# Altium PCB PCB.PcbDoc
Units mm, origin at the board's own origin, x right, y up, seen from the top; angles counter-clockwise.
Board outline 30 x 30 mm, 2 copper layers (Top Layer, Bottom Layer); 4 components, 4 nets, 46 pads, 0 vias.
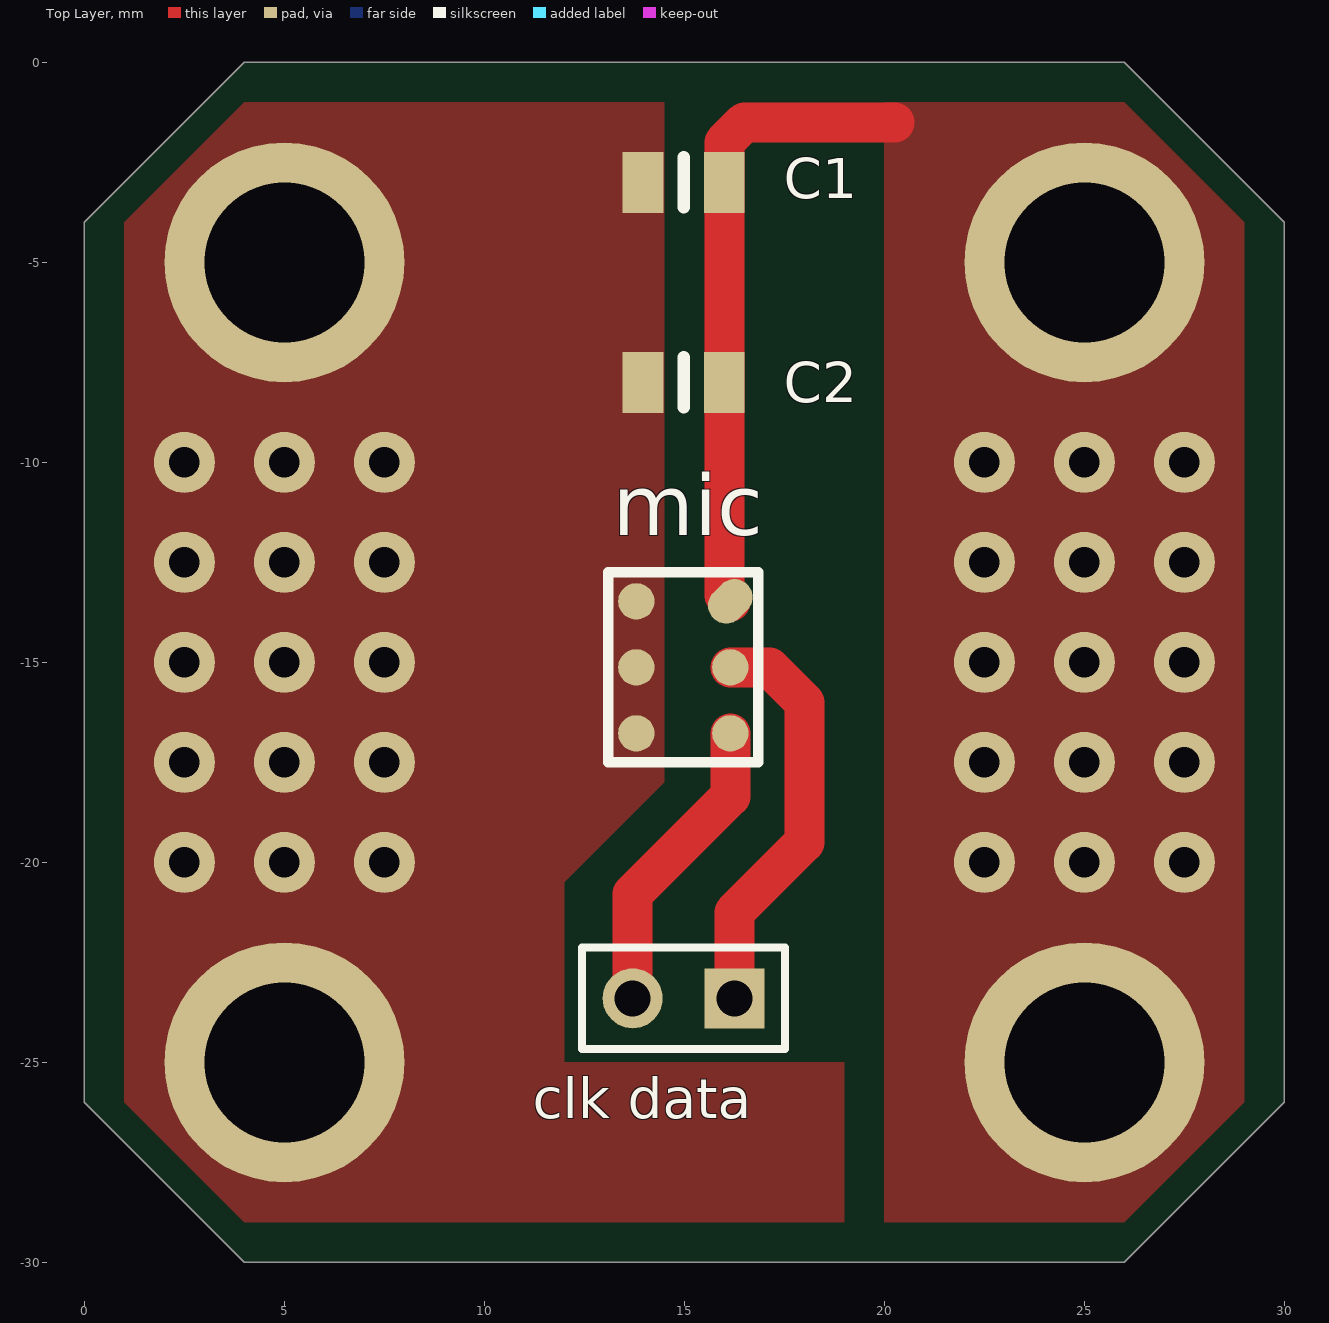
[diagram p0: Top Layer view]
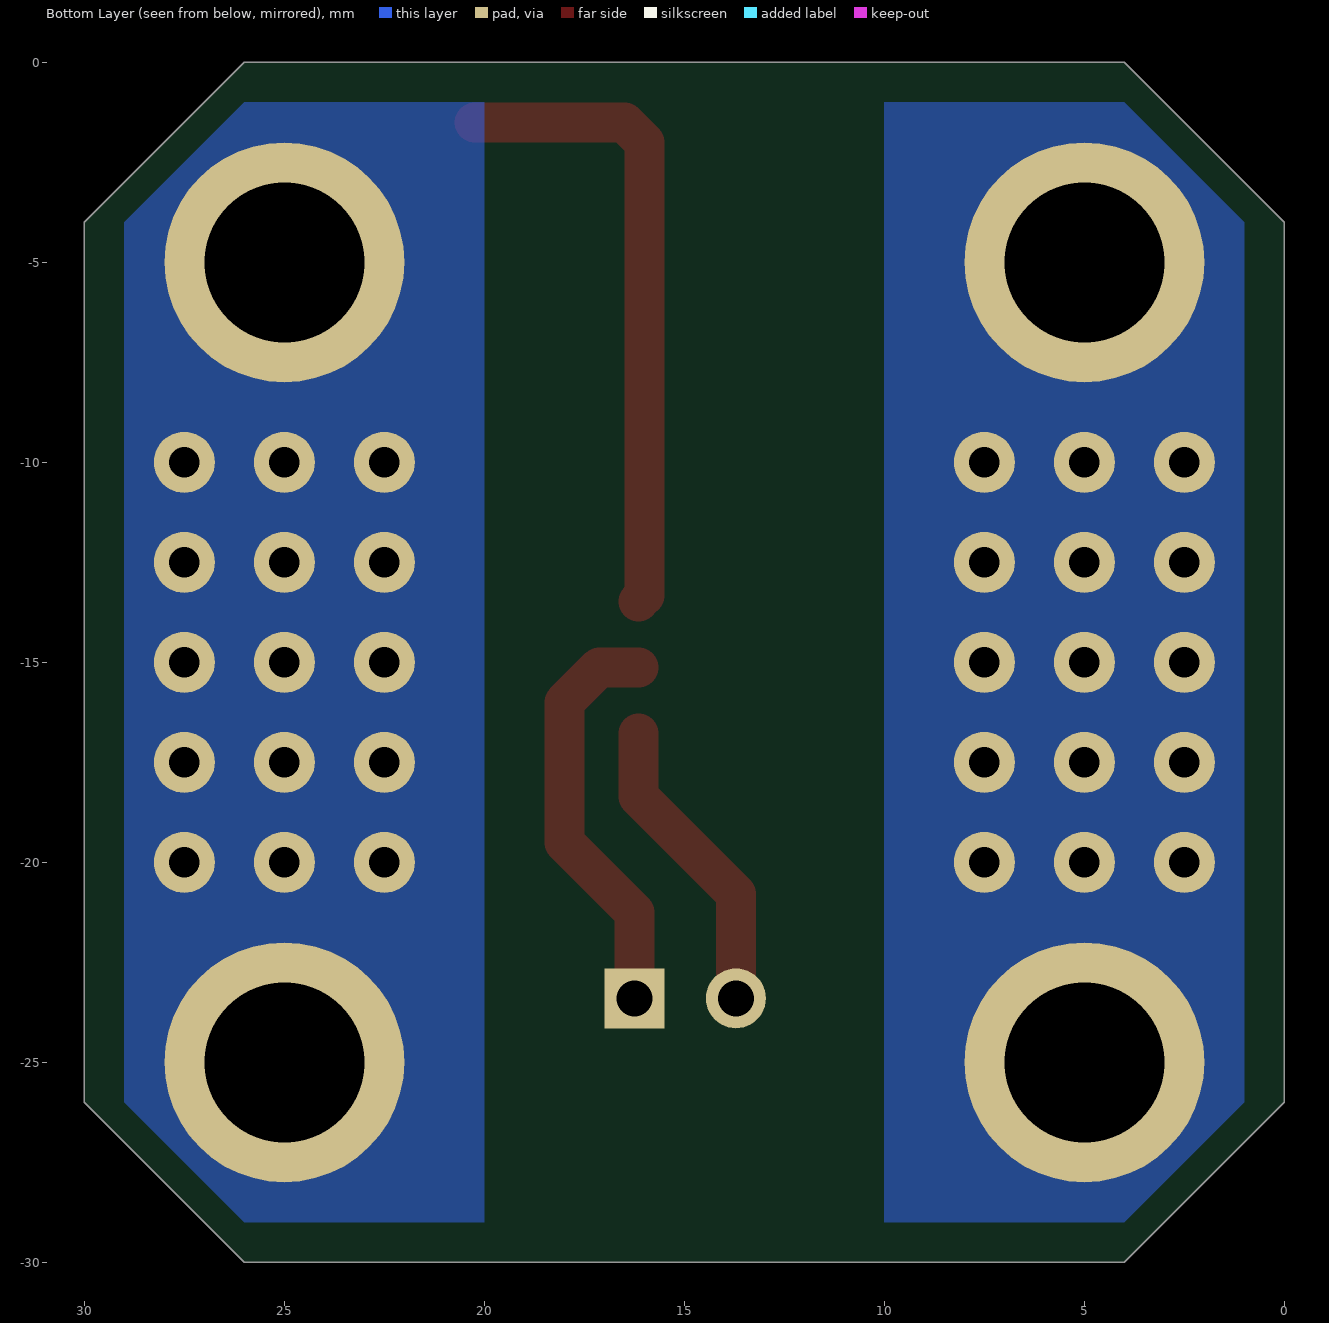
[diagram p1: Bottom Layer view, seen from below]

## Layer stack, top to bottom
Top Solder: solder mask 0.0102, Solder Resist, Dk 3.5
Top Layer: signal copper 0.0356
Dielectric 1: dielectric 0.32, FR-4, Dk 4.8
Bottom Layer: signal copper 0.0356
Bottom Solder: solder mask 0.0102, Solder Resist, Dk 3.5

## Board outline
2,-28 4,-30 26,-30 28,-28 30,-26 30,-4 28,-2 26,0 4,0 2,-2 0,-4 0,-26

## Design rules (kind name [scope] priority, off if disabled: settings)
Clearance [All] p1: gap=0.254 ignorepadtopadclearanceinfootprint=FALSE except(0: Arc-Hole Track-Hole SMDPad-Hole THPad-Hole Via-Hole Fill-Hole Poly-Hole Region-Hole Text-Hole)
ComponentClearance [All] p1: gap=0.025 collisioncheckmode=3 verticalgap=0.025 showdistances=FALSE
PolygonConnect [All] p1: connectstyle=Direct reliefconductorwidth=0.254 reliefentries=4 polygonreliefangle="90 Angle" airgapwidth=0.254
RoutingVias [All] p1: holewidth=0.711 width=1.27 viastyle="Through Hole" minholewidth=0.711 minwidth=1.27 maxholewidth=0.711 maxwidth=1.27
SolderMaskExpansion [All] p1: expansion=0.102
Width [All] p1: maxlimit=1 minlimit=0.254 preferedwidth=1 minimp=50.000000 maximp=50.000000 favimp=50.000000
29 further rules are at their usual default settings.

## Components (designator, comment, footprint, x,y, rotation, side; value= is the part's Value field where it differs from the comment)
C1 "10uF" SMD-0805C 14.984,-3 r90 top
C2 "100nF" SMD-0805C 14.984,-8 r90 top
"clk data" "Header 2" HDR1X2 16.25,-23.4 r180 top
mic "MP45DT02" HLGA6L 13.1,-12.75 r0 top

## Footprints (in the part's own frame and the unit in brackets; to place one, negate y for a bottom-side part, rotate by r counter-clockwise, add the part's x,y. Pads: shape width x height; smd on the part's side, far side on the other; paste and mask are expansions set on the pad)
HDR1X2 [mm] "Connector; Header; 2 Position"
  rect 1.5x1.5 hole 0.9: 1(0,0)
  round 1.5 hole 0.9: 2(2.54,0)
  silkscreen extent -1.27,-1.27 3.81,1.27
HLGA6L [mm]
  round 0.91 smd: 1(0.7,-0.725) 2(0.7,-2.375) 3(0.7,-4.025) 4(3.05,-4.025) 5(3.05,-2.375)
  oval 1.2x0.91 smd rot 45: 6(3.05,-0.725)
  silkscreen extent 0,-4.75 3.75,0, body extent -0.13,-4.88 3.88,0.13, height 1
SMD-0805C [mil]
  rect 60x40 smd: 1(0,40) 2(0,-40)
  silkscreen extent -25,0 25,0, body extent -25,-39 25,39, height 35

## Part data
C1 C2: library part CAPACITOR, "CAP MLCC SMT"
"clk data": "Header, 2-Pin", LatestRevisionDate=17-Jul-2002, LatestRevisionNote="Re-released for DXP Platform.", Publisher="Altium Limited"

## Free pads (board coordinates)
  round 6 hole 4: 7(5,-25) 7(5,-5) 7(25,-25) 7(25,-5)
  round 1.524 hole 0.762: 8(2.5,-20) 8(2.5,-17.5) 8(2.5,-15) 8(2.5,-12.5) 8(2.5,-10) 8(5,-20) 8(5,-17.5) 8(5,-15) 8(5,-12.5) 8(5,-10) 8(7.5,-20) 8(7.5,-17.5) 8(7.5,-15) 8(7.5,-12.5) 8(7.5,-10) 8(22.5,-20) 8(22.5,-17.5) 8(22.5,-15) 8(22.5,-12.5) 8(22.5,-10) 8(25,-20) 8(25,-17.5) 8(25,-15) 8(25,-12.5) 8(25,-10) 8(27.5,-20) 8(27.5,-17.5) 8(27.5,-15) 8(27.5,-12.5) 8(27.5,-10)

## Nets (pads, with @x,y where several pads share a name; then routed paths per layer and width w, separated by ;. In a path a pad name is that pad's centre, name@x,y a point inside that pad or via, vN(x,y) a via of type N, cw(c..) or ccw(c..) an arc to the next point about the centre after c; other vN are vias at no path point)
GND: C1.1 C2.1 mic.1 mic.2 mic.3 pad.7@5,-5 pad.7@5,-25 pad.8@2.5,-10 pad.8@2.5,-12.5 pad.8@2.5,-15 pad.8@2.5,-17.5 pad.8@2.5,-20 pad.8@5,-10 pad.8@5,-12.5 pad.8@5,-15 pad.8@5,-17.5 pad.8@5,-20 pad.8@7.5,-10 pad.8@7.5,-12.5 pad.8@7.5,-15 pad.8@7.5,-17.5 pad.8@7.5,-20
"Netclk data_1": "clk data.1" mic.5 | length 10.3
  Top Layer w1: mic.5 17.125,-15.125 18,-16 18,-19.5 16.25,-21.25 16.25,-23.4
"Netclk data_2": "clk data.2" mic.4 | length 7.6
  Top Layer w1: 13.71,-23.4 13.71,-20.79 16.15,-18.35 mic.4
VCC: C1.2 C2.2 mic.6 pad.7@25,-5 pad.7@25,-25 pad.8@22.5,-10 pad.8@22.5,-12.5 pad.8@22.5,-15 pad.8@22.5,-17.5 pad.8@22.5,-20 pad.8@25,-10 pad.8@25,-12.5 pad.8@25,-15 pad.8@25,-17.5 pad.8@25,-20 pad.8@27.5,-10 pad.8@27.5,-12.5 pad.8@27.5,-15 pad.8@27.5,-17.5 pad.8@27.5,-20 | length 17.4
  Top Layer w1: mic.6 16,-13.325 C2.2 C1.2 16,-2 16.5,-1.5 20.25,-1.5 ; pad.7@24,-6 pad.7@25,-5

## Polygon pours and split planes (outlines as drawn)
GND on Top Layer "Bottom Layer-No Net" (solid, pour order 26): 10,-1 14.5,-1 14.5,-18 12,-20.5 12,-25 19,-25 19,-29 10,-29
VCC on Top Layer "Bottom Layer-No Net" (solid, pour order 18): 20,-29 26,-29 29,-26 29,-4 26,-1 20,-1
GND on Top Layer "Bottom Layer-No Net" (solid, pour order 16): 1,-4 1,-26 4,-29 10,-29 10,-1 4,-1
GND on Bottom Layer "Bottom Layer-No Net" (solid, pour order 22): 10,-1 4,-1 1,-4 1,-26 4,-29 10,-29
VCC on Bottom Layer "Bottom Layer-No Net" (solid, pour order 20): 20,-1 20,-29 26,-29 29,-26 29,-4 26,-1
VCC on Bottom Solder "Bottom Layer-No Net" (solid): 20,-29 26,-29 29,-26 29,-4 26,-1 20,-1
GND on Bottom Solder "Bottom Layer-No Net" (solid): 10,-29 4,-29 1,-26 1,-4 4,-1 10,-1